# Altium PCB carrier_board.PcbDoc (part 9 of 18)
Units mm, origin at the board's own origin, x right, y up, seen from the top; angles counter-clockwise.
Board outline 146 x 102 mm, 20 copper layers (F.Cu, F.Mask, B.Cu, B.Mask, In1.Cu, F.SilkS, In2.Cu, B.SilkS, F.Adhes, B.Adhes, F.Paste, B.Paste, Dwgs.User, Cmts.User, Eco1.User, Eco2.User, Edge.Cuts, Margin, B.CrtYd, F.CrtYd); 256 components, 384 nets, 1262 pads, 1024 vias.
Unrouted connection lines stored in the file: 117.
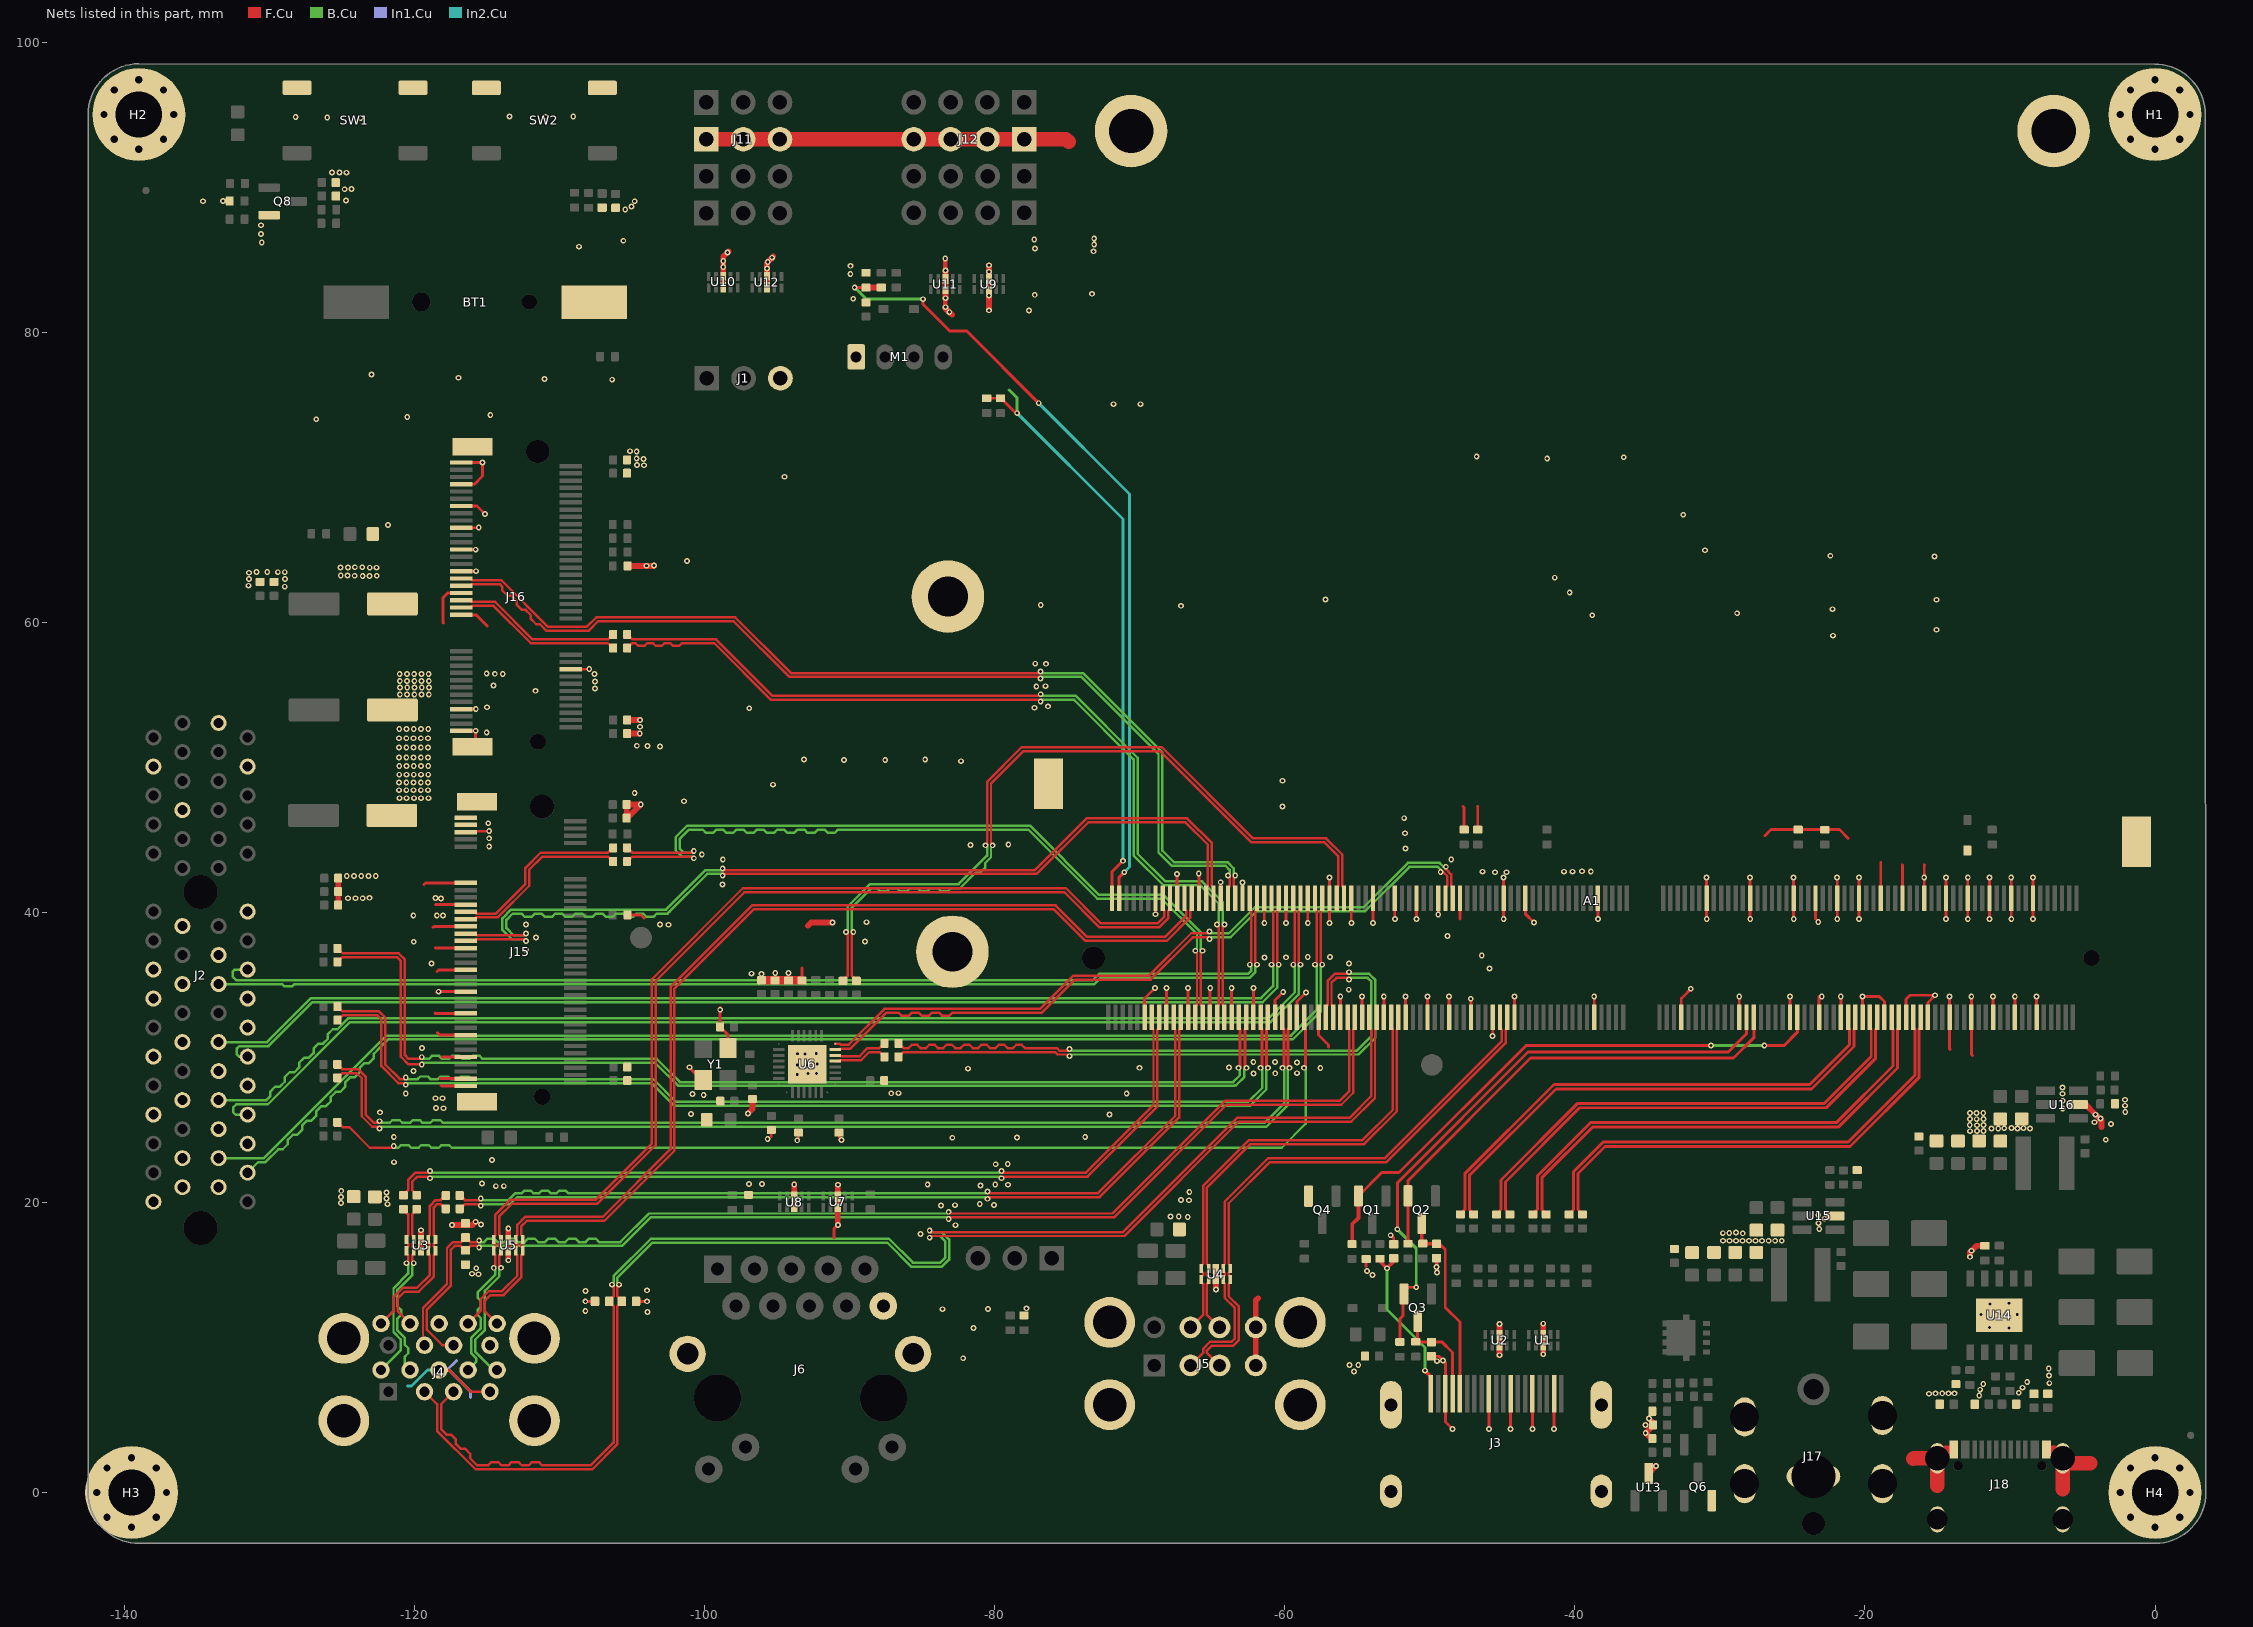
[diagram p19: the nets of this part, all layers, seen from the top]

## Via types
v1: diameter 0.4, hole 0.2, F.Cu to B.Cu, tented both sides, 956 vias
v2: diameter 0.5, hole 0.3, F.Cu to B.Cu, tented both sides, 68 vias

## Nets (pads, with @x,y where several pads share a name; then routed paths per layer and width w, separated by ;. In a path a pad name is that pad's centre, name@x,y a point inside that pad or via, vN(x,y) a via of type N, cw(c..) or ccw(c..) an arc to the next point about the centre after c; other vN are vias at no path point) (continued)
CON_PCIE_TX_0+: C55.2 J16.35 | length 11.7
  F.Cu w0.17: J16.35@-116.77,61.01 -116.145,61.01 -116.031,61.124 -114.546,61.124 -111.971,58.549 -106.659,58.549 -106.33,58.22 C55.2@-106.3,58.22
CON_PCIE_TX_0-: C56.2 J16.37 | length 11.7
  F.Cu w0.17: J16.37@-116.77,61.51 -116.145,61.51 -116.031,61.396 -114.434,61.396 -111.859,58.821 -106.659,58.821 -106.33,59.15 C56.2@-106.3,59.15
CON_PCIE_TX_1+: C49.2 J15.49 | length 12.7
  F.Cu w0.17: J15.49@-116.47,40.03 -115.845,40.03 -115.731,39.916 -114.386,39.916 -112.356,41.946 -112.356,43.056 -111.296,44.116 -106.664,44.116 -106.33,44.45 C49.2@-106.3,44.45
CON_PCIE_TX_1-: C50.2 J15.47 | length 12.7
  F.Cu w0.17: J15.47@-116.47,39.53 -115.845,39.53 -115.731,39.644 -114.274,39.644 -112.084,41.834 -112.084,42.944 -111.184,43.844 -106.664,43.844 -106.33,43.51 C50.2@-106.3,43.51
CON_USB1_D_N: A1.109 J5.2 U4.2 U4.9 | length 39.3
  F.Cu w0.17: J5.2@-66.5,8.762 -65.636,9.626 -65.636,9.906 -65.136,10.406 -63.656,10.406 -63.436,10.626 -63.436,12.714 -64.136,13.414 -64.136,14.379 -64.25,14.493 U4.9@-64.25,14.68 -64.25,14.867 -64.136,14.981 -64.136,15.154 -64.25,15.268 U4.2@-64.25,15.455 -64.25,15.642 -64.136,15.756 -64.136,20.056 -61.14,23.052 -53.1,23.052 -45.051,31.101 -45.051,31.921 -45.165,32.035 A1.109@-45.165,32.76
CON_USB1_D_P: A1.111 J5.3 U4.1 U4.10 | length 39.3
  F.Cu w0.17: J5.3@-64.5,8.762 -65.364,9.626 -65.364,9.794 -65.024,10.134 -63.544,10.134 -63.164,10.514 -63.164,12.826 -63.864,13.526 -63.864,14.379 -63.75,14.493 U4.10@-63.75,14.68 -63.75,14.867 -63.864,14.981 -63.864,15.154 -63.75,15.268 U4.1@-63.75,15.455 -63.75,15.642 -63.864,15.756 -63.864,19.944 -61.028,22.78 -52.988,22.78 -44.779,30.989 -44.779,31.921 -44.665,32.035 A1.111@-44.665,32.76
CON_USB2_D_N: A1.79 J5.6 U4.5 U4.6 | length 32
  F.Cu w0.17: J5.6@-66.5,11.382 -65.636,12.246 -65.636,13.43 -65.636,14.379 -65.75,14.493 U4.6@-65.75,14.68 -65.75,14.867 -65.636,14.981 -65.636,15.154 -65.75,15.268 U4.5@-65.75,15.455 -65.75,15.642 -65.636,15.756 -65.636,21.136 -62.476,24.296 -54.646,24.296 -52.551,26.391 -52.551,31.921 -52.665,32.035 A1.79@-52.665,32.76
CON_USB2_D_P: A1.81 J5.7 U4.4 U4.7 | length 32
  F.Cu w0.17: J5.7@-64.5,11.382 -65.364,12.246 -65.364,13.43 -65.364,14.379 -65.25,14.493 U4.7@-65.25,14.68 -65.25,14.867 -65.364,14.981 -65.364,15.154 -65.25,15.268 U4.4@-65.25,15.455 -65.25,15.642 -65.364,15.756 -65.364,21.024 -62.364,24.024 -54.534,24.024 -52.279,26.279 -52.279,31.921 -52.165,32.035 A1.81@-52.165,32.76
CON_USB3_D_N: A1.73 D8.2 J4.2 | length 96.7
  F.Cu w0.17: J4.2@-119.3,6.95 -118.436,6.086 -118.436,4.254 -115.786,1.604 -107.734,1.604 -106.004,3.334 -106.004,12.846 -105.695,13.155 D8.2@-105.695,13.18 -105.695,13.205 -106.004,13.514 -106.004,14.215 v1(-105.889,14.33) ; v1(-84.48,18.071) -84.365,17.956 -71.166,17.956 -63.29,25.832 -55.54,25.832 -54.051,27.321 -54.051,31.921 -54.165,32.035 A1.73@-54.165,32.76
  B.Cu w0.17: v1(-105.889,14.33) -106.004,14.445 -106.004,14.814 -103.594,17.224 -87.406,17.224 -85.756,15.574 -83.634,15.574 -83.144,16.064 -83.144,17.446 -83.654,17.956 -84.365,17.956 v1(-84.48,18.071)
CON_USB3_D_P: A1.75 D7.2 J4.3 | length 96.7
  F.Cu w0.17: J4.3@-117.3,6.95 -118.164,6.086 -118.164,4.366 -117.79,3.993 -117.483,3.993 -117.142,3.652 -117.142,3.344 -116.8,3.003 -116.493,3.003 -116.152,2.662 -116.152,2.354 -115.674,1.876 -114.924,1.876 -114.706,2.094 -114.224,2.094 -114.006,1.876 -113.524,1.876 -113.306,2.094 -112.824,2.094 -112.606,1.876 -112.124,1.876 -111.906,2.094 -111.424,2.094 -111.206,1.876 -107.846,1.876 -107.749,1.973 -106.276,3.446 -106.276,12.846 -106.585,13.155 D7.2@-106.585,13.18 -106.585,13.205 -106.276,13.514 -106.276,14.215 v1(-106.391,14.33) ; v1(-84.48,17.569) -84.365,17.684 -71.054,17.684 -63.178,25.56 -55.428,25.56 -53.779,27.209 -53.779,31.921 -53.665,32.035 A1.75@-53.665,32.76
  B.Cu w0.17: v1(-106.391,14.33) -106.276,14.445 -106.276,14.926 -103.706,17.496 -87.294,17.496 -85.644,15.846 -83.746,15.846 -83.416,16.176 -83.416,17.334 -83.766,17.684 -84.365,17.684 v1(-84.48,17.569)
CON_USB3_SSRX_N: A1.18 J4.5 U5.4 U5.7 | length 77
  F.Cu w0.17: v1(-114.029,15.49) -114.144,15.605 -114.144,16.368 -114.03,16.482 U5.7@-114.03,16.67 -114.03,16.857 -114.144,16.972 -114.144,17.143 -114.03,17.257 U5.4@-114.03,17.445 -114.03,17.632 -114.144,17.746 -114.144,19.054 -113.294,19.904 -107.414,19.904 -103.364,23.954 -103.364,35.274 -97.254,41.384 -75.196,41.384 -72.776,38.964 -68.674,38.964 -68.029,39.609 -68.029,40.121 -67.915,40.235 A1.18@-67.915,40.96
  B.Cu w0.17: J4.5@-114.3,8.45 -114.554,8.45 -115.824,9.72 -115.824,10.534 -115.144,11.214 -115.144,13.907 -114.144,14.907 -114.144,15.375 v1(-114.029,15.49)
CON_USB3_SSRX_P: A1.16 J4.6 U5.5 U5.6 | length 77
  F.Cu w0.17: v1(-114.531,15.49) -114.416,15.605 -114.416,16.368 -114.53,16.482 U5.6@-114.53,16.67 -114.53,16.857 -114.416,16.972 -114.416,17.143 -114.53,17.257 U5.5@-114.53,17.445 -114.53,17.632 -114.416,17.746 -114.416,19.166 -113.406,20.176 -107.526,20.176 -103.636,24.066 -103.636,35.386 -97.366,41.656 -75.084,41.656 -72.664,39.236 -68.786,39.236 -68.301,39.721 -68.301,40.121 -68.415,40.235 A1.16@-68.415,40.96
  B.Cu w0.17: J4.6@-116.3,8.45 -115.728,9.022 -115.728,9.239 -116.096,9.607 -116.096,10.646 -115.473,11.269 -115.416,11.326 -115.416,12.012 -115.624,12.22 -115.624,12.612 -115.416,12.82 -115.416,13.212 -115.624,13.42 -115.624,13.812 -114.792,14.644 -114.416,15.02 -114.416,15.375 v1(-114.531,15.49)
CON_USB3_SSTX_N: C26.2 J4.8 U3.4 U3.7 | length 12.7
  F.Cu w0.17: v1(-120.049,15.81) -120.164,15.925 -120.164,16.368 -120.05,16.482 U3.7@-120.05,16.67 -120.05,16.857 -120.164,16.972 -120.164,17.143 -120.05,17.257 U3.4@-120.05,17.445 -120.05,17.632 -120.164,17.746 -120.164,18.082 -120.166,18.084 -120.166,19.178 -119.842,19.502 C26.2@-119.842,19.532
  B.Cu w0.17: J4.8@-120.3,8.45 -120.68,8.83 -120.68,9.353 -120.43,9.603 -120.43,9.953 -120.68,10.203 -120.68,10.682 -120.744,10.747 -121.174,11.176 -121.174,11.993 -120.924,12.243 -120.924,12.593 -121.174,12.843 -121.174,13.501 -121.174,13.964 -120.164,14.974 -120.164,15.695 v1(-120.049,15.81)
CON_USB3_SSTX_P: C27.2 J4.9 U3.5 U3.6 | length 12.7
  F.Cu w0.17: C27.2@-120.762,19.532 -120.762,19.502 -120.438,19.178 -120.438,17.98 -120.436,17.978 -120.436,17.746 -120.55,17.632 U3.5@-120.55,17.445 -120.55,17.257 -120.436,17.143 -120.436,16.972 -120.55,16.857 U3.6@-120.55,16.67 -120.55,16.482 -120.436,16.368 -120.436,15.925 v1(-120.551,15.81)
  B.Cu w0.17: J4.9@-122.3,8.45 -120.952,9.798 -120.952,10.57 -121.446,11.064 -121.446,14.076 -120.436,15.086 -120.436,15.695 v1(-120.551,15.81)
CON_USB4_D_N: A1.67 D6.2 J4.11 | length 80.9
  F.Cu w0.17: J4.11@-119.3,10.15 -119.412,10.262 -119.412,12.73 -117.756,14.386 -117.756,16.846 -117.333,17.27 -116.79,17.27 D6.2@-116.48,17.58 -116.455,17.58 -116.145,17.27 -115.655,17.27 v1(-115.54,17.385) ; v1(-83.17,19.351) -83.055,19.236 -71.886,19.236 -64.12,27.002 -56.22,27.002 -55.551,27.671 -55.551,31.921 -55.665,32.035 A1.67@-55.665,32.76
  B.Cu w0.17: v1(-115.54,17.385) -115.425,17.27 -115.204,17.27 -114.966,17.507 -114.504,17.507 -114.266,17.27 -113.804,17.27 -113.566,17.507 -113.104,17.507 -112.866,17.27 -112.404,17.27 -112.166,17.507 -111.704,17.507 -111.466,17.27 -111.004,17.27 -110.766,17.507 -110.304,17.507 -110.066,17.27 -109.604,17.27 -109.366,17.507 -108.904,17.507 -108.666,17.27 -108.204,17.27 -107.966,17.507 -107.504,17.507 -107.266,17.27 -105.803,17.27 -105.748,17.325 -103.836,19.236 -83.285,19.236 v1(-83.17,19.351)
CON_USB4_D_P: A1.69 D5.2 J4.12 | length 80.9
  F.Cu w0.17: J4.12@-117.3,10.15 -118.07,10.15 -119.14,11.22 -119.14,12.618 -117.484,14.274 -117.484,16.734 -117.22,16.998 -116.815,16.998 -116.505,16.688 D5.2@-116.48,16.688 -116.455,16.688 -116.145,16.998 -115.655,16.998 v1(-115.54,16.883) ; v1(-83.17,18.849) -83.055,18.964 -71.774,18.964 -64.008,26.73 -56.108,26.73 -55.279,27.559 -55.279,31.921 -55.165,32.035 A1.69@-55.165,32.76
  B.Cu w0.17: v1(-115.54,16.883) -115.425,16.998 -105.69,16.998 -103.724,18.964 -83.285,18.964 v1(-83.17,18.849)
CON_USB4_SSRX_N: A1.24 J4.14 U5.1 U5.10 | length 73.5
  F.Cu w0.17: J4.14@-114.3,11.65 -115.164,12.514 -115.164,13.214 -114.764,13.614 -113.854,13.614 -112.644,14.824 -112.644,16.368 -112.53,16.482 U5.10@-112.53,16.67 -112.53,16.857 -112.644,16.972 -112.644,17.143 -112.53,17.257 U5.1@-112.53,17.445 -112.53,17.632 -112.644,17.746 -112.644,18.344 -112.254,18.734 -106.904,18.734 -102.074,23.564 -102.074,34.744 -96.614,40.204 -75.916,40.204 -73.746,38.034 -68.134,38.034 -66.529,39.639 -66.529,40.121 -66.415,40.235 A1.24@-66.415,40.96
CON_USB4_SSRX_P: A1.22 J4.15 U5.2 U5.9 | length 73.5
  F.Cu w0.17: J4.15@-116.3,11.65 -115.436,12.514 -115.436,13.326 -114.876,13.886 -113.966,13.886 -112.916,14.936 -112.916,16.368 -113.03,16.482 U5.9@-113.03,16.67 -113.03,16.857 -112.916,16.972 -112.916,17.143 -113.03,17.257 U5.2@-113.03,17.445 -113.03,17.632 -112.916,17.746 -112.916,18.456 -112.366,19.006 -107.016,19.006 -102.346,23.676 -102.346,34.856 -96.726,40.476 -75.804,40.476 -73.634,38.306 -68.246,38.306 -66.801,39.751 -66.801,40.121 -66.915,40.235 A1.22@-66.915,40.96
CON_USB4_SSTX_N: C28.2 J4.17 U3.1 U3.10 | length 11.2
  F.Cu w0.17: J4.17@-120.3,11.65 -121.164,12.514 -121.164,13.364 -120.684,13.844 -119.714,13.844 -118.664,14.894 -118.664,16.368 -118.55,16.482 U3.10@-118.55,16.67 -118.55,16.857 -118.664,16.972 -118.664,17.143 -118.55,17.257 U3.1@-118.55,17.445 -118.55,17.632 -118.664,17.746 -118.664,19.654 -118.434,19.884 -118.194,19.884 -117.87,19.56 C28.2@-117.84,19.56
CON_USB4_SSTX_P: C29.2 J4.18 U3.2 U3.9 | length 11.7
  F.Cu w0.17: J4.18@-122.3,11.65 -121.436,12.514 -121.436,13.476 -120.796,14.116 -119.826,14.116 -118.936,15.006 -118.936,16.368 -119.05,16.482 U3.9@-119.05,16.67 -119.05,16.857 -118.936,16.972 -118.936,17.143 -119.05,17.257 U3.2@-119.05,17.445 -119.05,17.632 -118.936,17.746 -118.936,19.766 -118.546,20.156 -118.194,20.156 -117.87,20.48 C29.2@-117.84,20.48
DDC_SCL: D1.2 J3.15 Q2.3 R15.2 | length 13.4
  F.Cu w0.2: D1.2@-49.31,17.13 -48.935,16.755 -48.935,12.765 -47.93,11.76 J3.15@-47.93,6.805
  F.Cu w0.25: Q2.3@-50.56,18.573 -50.56,17.43 -50.28,17.15 -49.33,17.15 D1.2@-49.31,17.13
DDC_SDA: D3.2 J3.16 Q3.3 R18.2 | length 7.3
  F.Cu w0.206: Q3.3@-50.835,11.953 -50.835,10.52 R18.2@-50.965,10.39 -49.175,10.39 -48.43,9.645 J3.16@-48.43,6.805
DDI_B_DDC_SCL: A1.171 Q2.2 R5.2 | length 33.7
  F.Cu w0.209: R5.2@-51.5,17.15 -51.5,20.438 Q2.2@-51.51,20.447 -51.51,21.497 -43.056,29.951 -29.059,29.951 -27.665,31.345 A1.171@-27.665,32.76
DDI_B_DDC_SDA: A1.169 Q3.2 R3.2 | length 41.7
  F.Cu w0.2: v1(-52.24,18.15) -52.24,21.345 -43.225,30.36 -29.43,30.36 -28.165,31.625 A1.169@-28.165,32.76 ; Q3.2@-51.785,13.828 -51.463,14.15 v1(-50.935,14.15)
  F.Cu w0.206: R3.2@-52.065,10.382 -52.065,11.97 -51.835,12.2 -51.835,13.637 Q3.2@-51.785,13.687
  B.Cu w0.2: v1(-52.24,18.15) -50.935,16.845 -50.935,14.1 v1(-50.935,14.15)
DDI_B_HPD: A1.183 Q1.2 R4.2 | length 39.5
  F.Cu w0.209: Q1.2@-54.92,20.445 -53.308,22.057 -52.123,22.057 -43.37,30.81 v1(-30.62,30.81) ; v1(-26.94,30.81) -25.581,30.81 -24.665,31.726 A1.183@-24.665,32.76
  F.Cu w0.25: R4.2@-55.36,17.127 -55.36,18.49 -54.92,18.93 Q1.2@-54.92,20.445
  B.Cu w0.209: v1(-30.62,30.81) v1(-26.94,30.81)
DDI_B_TX0+: A1.217 C17.1 | length 33.4
  F.Cu w0.206: C17.1@-39.475,19.17 -39.475,19.2 -39.781,19.506 -39.781,21.991 -37.923,23.85 -21.035,23.85 -16.261,28.624 -16.261,31.939 -16.165,32.035 A1.217@-16.165,32.76
DDI_B_TX0-: A1.215 C18.1 | length 33.4
  F.Cu w0.206: C18.1@-40.395,19.17 -40.395,19.2 -40.089,19.506 -40.089,22.119 -38.314,23.894 -38.05,24.157 -21.162,24.157 -16.569,28.751 -16.569,31.939 -16.665,32.035 A1.215@-16.665,32.76
DDI_B_TX1+: A1.211 C19.1 | length 33.8
  F.Cu w0.206: C19.1@-41.975,19.17 -41.975,19.2 -42.281,19.506 -42.281,21.694 -38.789,25.186 -21.849,25.186 -17.761,29.274 -17.761,31.939 -17.665,32.035 A1.211@-17.665,32.76
DDI_B_TX1-: A1.209 C20.1 | length 33.8
  F.Cu w0.206: C20.1@-42.895,19.17 -42.895,19.2 -42.589,19.506 -42.589,21.821 -38.916,25.494 -21.976,25.494 -18.069,29.401 -18.069,31.939 -18.165,32.035 A1.209@-18.165,32.76
DDI_B_TX2+: A1.205 C21.1 | length 34.3
  F.Cu w0.206: C21.1@-44.482,19.17 -44.482,19.2 -44.788,19.506 -44.788,21.412 -39.674,26.526 -22.666,26.526 -19.261,29.931 -19.261,31.939 -19.165,32.035 A1.205@-19.165,32.76
DDI_B_TX2-: A1.203 C22.1 | length 34.3
  F.Cu w0.206: C22.1@-45.402,19.17 -45.402,19.2 -45.096,19.506 -45.096,21.539 -39.801,26.834 -22.794,26.834 -19.569,30.059 -19.569,31.939 -19.665,32.035 A1.203@-19.665,32.76
DDI_B_TX3+: A1.199 C23.1 | length 35.1
  F.Cu w0.206: C23.1@-46.974,19.17 -46.974,19.2 -47.28,19.506 -47.28,21.852 -41.306,27.826 -23.686,27.826 -20.761,30.751 -20.761,31.939 -20.665,32.035 A1.199@-20.665,32.76
DDI_B_TX3-: A1.197 C24.1 | length 35.1
  F.Cu w0.206: C24.1@-47.894,19.17 -47.894,19.2 -47.588,19.506 -47.588,21.98 -41.434,28.134 -23.814,28.134 -21.069,30.879 -21.069,31.939 -21.165,32.035 A1.197@-21.165,32.76
FAN_1_PWM: A1.2 R64.2 R69.1 TP12.1 | length 41.1
  F.Cu w0.2: R69.1@-80.55,75.44 R64.2@-79.6,75.44 -79.56,75.44 -78.53,74.41 v1(-78.45,74.41) ; A1.2@-71.915,40.96 -71.915,42.795 v1(-71.16,43.55)
  B.Cu w0.2: TP12.1@-79,76 -78.45,75.45 v1(-78.45,74.41)
  In2.Cu w0.2: v1(-78.45,74.41) -71.16,67.12 v1(-71.16,43.55)
FAN_1_TAC: A1.4 R66.1 R68.2 TP11.1 | length 55.1
  F.Cu w0.2: v1(-89.65,83.08) -89.64,83.07 R66.1@-88.87,83.07 ; v1(-84.95,82.27) -84.95,81.92 -83.12,80.09 -81.95,80.09 v1(-76.96,75.1) ; A1.4@-71.415,40.96 -71.415,42.415 v1(-71.07,42.76)
  F.Cu w0.4: R66.1@-88.87,83.07 R68.2@-87.82,83.07
  B.Cu w0.2: v1(-89.65,83.08) -88.84,82.27 v1(-84.95,82.27)
  In2.Cu w0.2: v1(-76.96,75.1) -70.7,68.84 -70.7,43.13 v1(-71.07,42.76)
GbE_PCIe_CLK+: A1.94 U6.15 | length 49.9
  F.Cu w0.17: U6.15@-90.985,30.54 -90.685,30.54 -90.621,30.604 -89.944,30.604 -87.484,33.064 -86.616,33.064 -86.435,32.883 -85.916,32.883 -85.735,33.064 -85.216,33.064 -85.035,32.883 -84.516,32.883 -84.335,33.064 -83.816,33.064 -83.635,32.883 -83.116,32.883 -82.935,33.064 -80.93,33.064 -76.764,33.064 -74.464,35.364 -69.254,35.364 -66.334,38.284 -65.295,38.284 v1(-65.18,38.169) ; v1(-49.252,42.788) -49.09,42.788 -48.801,42.499 -48.801,41.799 -48.915,41.685 A1.94@-48.915,40.96
  B.Cu w0.17: v1(-65.18,38.169) -65.065,38.284 -63.734,38.284 -61.944,40.074 -54.464,40.074 -51.404,43.134 -49.436,43.134 -49.252,42.95 v1(-49.252,42.788)
GbE_PCIe_CLK-: A1.96 U6.16 | length 49.9
  F.Cu w0.17: U6.16@-90.985,30.94 -90.685,30.94 -90.621,30.876 -90.057,30.876 -87.596,33.336 -76.876,33.336 -74.576,35.636 -69.366,35.636 -66.446,38.556 -65.295,38.556 v1(-65.18,38.671) ; v1(-48.898,43.142) -48.898,42.98 -48.529,42.611 -48.529,41.799 -48.415,41.685 A1.96@-48.415,40.96
  B.Cu w0.17: v1(-65.18,38.671) -65.065,38.556 -63.846,38.556 -62.056,40.346 -54.576,40.346 -51.516,43.406 -49.324,43.406 -49.06,43.142 v1(-48.898,43.142)
GbE_PCIe_RX+: A1.64 C43.2 | length 53.2
  F.Cu w0.17: v1(-89.744,38.64) -89.859,38.525 -89.859,35.634 -89.535,35.31 C43.2@-89.535,35.28 ; v1(-80.139,44.62) -80.254,44.735 -80.254,48.884 -78.024,51.114 -68.596,51.114 -62.306,44.824 -57.266,44.824 -56.301,43.859 -56.301,41.799 -56.415,41.685 A1.64@-56.415,40.96
  B.Cu w0.17: v1(-89.744,38.64) -89.859,38.755 -89.859,40.299 -88.484,41.674 -88.133,41.674 -87.916,41.456 -87.433,41.456 -87.216,41.674 -86.733,41.674 -86.516,41.456 -86.033,41.456 -85.816,41.674 -85.333,41.674 -85.116,41.456 -84.633,41.456 -84.416,41.674 -83.933,41.674 -83.716,41.456 -83.233,41.456 -83.016,41.674 -82.374,41.674 -81.313,42.735 -81.005,42.735 -80.664,43.076 -80.664,43.384 -80.254,43.794 -80.254,44.505 v1(-80.139,44.62)
GbE_PCIe_RX-: A1.66 C39.2 | length 53.2
  F.Cu w0.17: C39.2@-90.455,35.28 -90.455,35.31 -90.131,35.634 -90.131,38.525 v1(-90.246,38.64) ; v1(-80.641,44.62) -80.526,44.735 -80.526,48.996 -78.136,51.386 -68.484,51.386 -62.194,45.096 -57.154,45.096 -56.029,43.971 -56.029,41.799 -55.915,41.685 A1.66@-55.915,40.96
  B.Cu w0.17: v1(-90.246,38.64) -90.131,38.755 -90.131,40.411 -88.596,41.946 -82.486,41.946 -80.526,43.906 -80.526,44.505 v1(-80.641,44.62)
GbE_PCIe_TX+: A1.61 C42.2 | length 44
  F.Cu w0.17: C42.2@-86.63,30.037 -86.6,30.037 -86.275,30.363 -75.827,30.363 -75.662,30.198 -74.962,30.198 v1(-74.847,30.083) ; A1.61@-57.165,32.76 -57.165,33.485 -57.051,33.599 -57.051,35.265 -56.559,35.757 -55.696,35.757 v1(-55.581,35.872)
  B.Cu w0.17: v1(-74.847,30.083) -74.732,30.198 -54.913,30.198 -53.757,31.354 -53.757,35.337 -54.177,35.757 -55.466,35.757 v1(-55.581,35.872)
GbE_PCIe_TX-: A1.63 C38.2 | length 44
  F.Cu w0.17: C38.2@-86.63,30.96 -86.6,30.96 -86.275,30.635 -85.943,30.635 -85.71,30.868 -85.343,30.868 -85.11,30.635 -84.743,30.635 -84.51,30.868 -84.143,30.868 -83.91,30.635 -83.543,30.635 -83.31,30.868 -82.943,30.868 -82.71,30.635 -82.343,30.635 -82.11,30.868 -81.743,30.868 -81.51,30.635 -81.143,30.635 -80.91,30.868 -80.543,30.868 -80.31,30.635 -79.943,30.635 -79.71,30.868 -79.343,30.868 -79.11,30.635 -78.743,30.635 -78.51,30.868 -78.143,30.868 -77.91,30.635 -75.782,30.635 -75.714,30.635 -75.55,30.47 -74.962,30.47 v1(-74.847,30.585) ; A1.63@-56.665,32.76 -56.665,33.485 -56.779,33.599 -56.779,35.153 -56.447,35.485 -55.696,35.485 v1(-55.581,35.37)
  B.Cu w0.17: v1(-74.847,30.585) -74.732,30.47 -55.025,30.47 -54.029,31.466 -54.029,35.225 -54.289,35.485 -55.466,35.485 v1(-55.581,35.37)
GND: A1.11 A1.14 A1.17 A1.20 A1.23 A1.26 A1.29 A1.32 A1.35 A1.38 A1.41 A1.44 A1.47 A1.50 A1.53 A1.56 A1.59 A1.62 A1.65 A1.68 A1.71 A1.74 A1.77 A1.80 A1.83 A1.86 A1.89 A1.92 A1.95 A1.98 A1.101 A1.107 A1.110 A1.113 A1.116 A1.135 A1.136 A1.151 A1.158 A1.167 A1.170 A1.181 A1.182 A1.188 A1.189 A1.194 A1.195 A1.200 A1.201 A1.206 A1.207 A1.212 A1.213 A1.218 A1.219 A1.224 A1.225 A1.230 A1.231 A1.236 A1.237 A1.242 A1.243 A1.248 A1.249 A1.MP BT1.2 C9.2 C10.2 C11.2 C12.2 C13.1 C14.1 C15.2 C16.2 C25.2 C30.1 C31.1 C32.1 C33.1 C34.1 C35.1 C36.1 C37.1 C40.1 C41.1 C44.1 C45.1 C46.1 C47.1 C48.2 C51.1 C52.1 C53.1 C54.1 C57.1 C58.1 C59.1 C60.1 C61.2 C62.2 C64.1 C65.1 C66.2 C67.1 C68.1 C69.2 C74.1 C75.1 C76.1 C77.1 C78.2 C79.2 C80.1 C81.1 C82.1 C83.1 C84.2 D1.1 D2.1 D3.1 D5.1 D6.1 D7.1 D8.1 D10.1 D11.1 D12.2 D13.2 D14.2 D21.1 D23.1 D24.2 D25.1 H1.1 H2.1 H3.1 H4.1 H5.1 H6.1 H7.1 H8.1 J1.3 J2.A1 J2.A4 J2.A12 J2.A15 J2.A18 J2.A20 J2.A23 J2.A24 J2.A27 J2.A28 J2.A31 J2.B4 J2.B7 J2.B13 J2.B16 J2.B17 J2.B18 J2.B21 J2.B22 J2.B25 J2.B26 J2.B29 J2.B31 J2.B32 J3.2 J3.5 J3.8 J3.11 J3.17 J3.SH J4.4 J4.7 J4.13 J4.16 J4.19 J5.4 J5.8 J5.9 J6.R10 J6.SH J11.1 J11.2 J11.3 J12.1 J12.2 J12.3 J12.4 J15.1 J15.3 J15.9 J15.15 J15.21 J15.27 J15.33 J15.39 J15.45 J15.51 J15.57 J15.71 J15.73 J15.75 J15.MP1 J15.MP2 J16.1 J16.7 J16.18 J16.33 J16.39 J16.45 J16.51 J16.57 J16.63 J16.69 J16.75 J16.MP1 J16.MP2 J17.2 J17.3 J18.A1 J18.A12 J18.B1 J18.B12 J18.S1 M1.1 Q4.2 Q6.2 Q8.2 R6.2 R22.1 R27.2 R32.2 R39.1 R42.1 R43.2 R49.1 R51.1 R58.1 R60.1 R66.2 R76.2 R77.2 R78.2 R79.2 SW1.2 SW2.2 U1.3 U1.8 U2.3 U2.8 U3.3 U3.8 U4.3 U4.8 U5.3 U5.8 U6.33 U7.3 U7.8 U8.3 U8.8 U9.3 U9.8 U10.3 U10.8 U11.3 U11.8 U12.3 U12.8 U13.3 U14.0 U15.2 U16.2 Y1.2 Y1.4 | length 316.8
  F.Cu w0.15: -95.4,24.51 C41.1@-95.4,25 ; v1@-93.52,24.31 -93.58,24.31 v1(-93.61,24.28) -93.52,24.37 C35.1@-93.52,24.81 ; -93.52,24.51 -93.51,24.5 ; v1@-90.735,24.315 -90.555,24.315 v1(-90.55,24.31) -90.735,24.495 C36.1@-90.735,24.81 ; C36.1@-90.735,24.535 -90.72,24.52
  F.Cu w0.2: -119.34,41.93 -119.24,42.03 J15.57@-116.47,42.03 ; -118.71,38.97 -118.65,39.03 J15.45@-116.47,39.03 ; -118.59,33.05 -118.57,33.03 J15.21@-116.47,33.03 ; -118.56,37.56 -118.53,37.53 J15.39@-116.47,37.53 ; -118.55,40.55 -118.53,40.53 J15.51@-116.47,40.53 ; v1@-118.49,34.49 -118.45,34.53 v1(-118.33,34.53) J15.27@-116.47,34.53 ; -118.44,35.93 -118.34,36.03 J15.33@-116.47,36.03 ; -118.41,31.7 -118.24,31.53 J15.15@-116.47,31.53 ; -118.21,28.56 -118.18,28.53 J15.3@-116.47,28.53 ; -118.16,28.07 -118.12,28.03 J15.1@-116.47,28.03 ; -118.1,30.02 -118.09,30.03 J15.9@-116.47,30.03 ; J4.7@-118.07,8.68 J4.7@-118.3,8.45 -117.598,8.45 -116.098,6.95 J4.4@-114.8,6.95 ; -118.01,59.94 -118.03,59.96 -118.03,61.69 -117.71,62.01 J16.39@-116.77,62.01 -117.695,62.01 ; J16.1@-116.77,52.51 -115.79,52.51 v1(-115.78,52.52) -115.78,51.625 J16.MP1@-115.995,51.41 ; J16.7@-116.77,54.01 -115.78,54.01 v1(-115.77,54.02) ; J16.33@-116.77,60.51 -115.75,60.51 -114.98,59.74 ; J16.45@-116.77,63.51 -115.77,63.51 v1(-115.76,63.52) ; J16.51@-116.77,65.01 -115.79,65.01 v1(-115.78,65) ; J16.57@-116.77,66.51 -115.58,66.51 v1(-115.57,66.52) ; J16.63@-116.77,68.01 -115.69,68.01 -115.45,67.77 -115.15,67.47 v1(-115.14,67.47) ; J16.69@-116.77,69.51 -115.87,69.51 -115.3,70.08 v1(-115.3,71.01) J16.75@-116.77,71.01 ; J15.71@-116.47,45.53 v1(-114.85,45.6) -114.91,45.53 v1@-114.9,45.52 ; J16.18@-109.22,56.76 -107.96,56.76 v1(-107.95,56.77) ; v1(-108.22,13.18) D7.1@-107.555,13.18 ; R27.2@-105.32,39.82 -104.38,39.82 -104.16,39.6 ; D8.1@-104.725,13.18 v1(-103.97,13.18) ; v1(-101.04,29.32) -101.05,29.31 -101.05,29.3 -100.19,28.44 Y1.2@-100.085,28.44 ; v1@-98.92,33.43 -98.925,33.425 v1(-98.925,33.28) C47.1@-98.925,32.1 -98.385,31.56 Y1.4@-98.385,30.64 ; C40.1@-96.075,35.32 v1(-96.075,35.76) v1@-96.075,35.82 ; -93.28,36.17 -93.275,36.165 C33.1@-93.275,35.29 ; -91.08,17.56 -91.08,18.18 v1(-90.81,18.45) ; v1@-83.43,85.1 v1(-83.41,85.08) v1@-83.4,85.07 ; v1@-80.4,84.6 v1(-80.39,84.61) ; A1.11@-69.665,32.76 -69.665,34.065 v1(-68.94,34.79) ; A1.14@-68.915,40.96 -68.915,39.875 v1(-68.91,39.87) ; A1.17@-68.165,32.76 -68.165,34.765 v1(-68.15,34.78) ; A1.20@-67.42,41.22 v1@-67.42,42.645 ; v1(-66.67,34.78) -66.665,34.775 A1.23@-66.665,32.76 ; v1(-65.93,42.67) -65.915,42.655 A1.26@-65.915,40.96 ; A1.29@-65.165,32.76 -65.165,34.755 v1(-65.14,34.78) ; v1(-64.42,42.07) -64.415,42.065 A1.32@-64.415,40.96 ; A1.35@-63.665,32.76 -63.665,34.775 v1(-63.66,34.78) ; v1(-62.92,42.06) -62.915,42.055 A1.38@-62.915,40.96 ; A1.41@-62.165,32.76 -62.165,34.765 v1(-62.15,34.78) ; A1.44@-61.415,40.96 -61.415,39.275 v1(-61.41,39.27) ; A1.47@-60.665,32.76 -60.665,33.955 -60.51,34.11 -60.12,34.5 v1(-60.11,34.5) ; v1@-59.915,39.275 A1.50@-59.915,40.96 ; A1.53@-59.165,32.76 -59.165,33.845 v1(-58.53,34.48) ; v1@-58.415,39.275 A1.56@-58.415,40.96 ; A1.59@-57.665,32.76 -57.665,31.535 -56.99,30.86 -56.99,30.72 ; v1@-56.915,39.275 A1.62@-56.915,40.96 v1@-56.915,42.385 ; A1.65@-56.165,32.76 v1@-56.165,34.185 ; v1@-55.415,39.275 A1.68@-55.415,40.96 ; A1.71@-54.665,32.76 v1@-54.665,34.185 ; -54.41,15.58 -54.39,15.6 R6.2@-54.39,16.098 ; v1@-53.915,39.275 A1.74@-53.915,40.96 ; A1.77@-53.165,32.76 v1@-53.165,34.185 ; v1(-52.7,17.74) -52.49,17.53 D2.1@-52.49,17.123 ; v1@-52.415,39.535 A1.80@-52.415,40.96 ; A1.83@-51.665,32.76 v1@-51.665,34.185 ; v1@-50.915,39.535 A1.86@-50.915,40.96 ; A1.89@-50.165,32.76 v1@-50.165,34.185 ; D3.1@-49.885,9.395 -49.38,9.395 v1(-49.085,9.1) -48.93,8.945 J3.17@-48.93,6.805 -48.93,4.86 v1(-48.44,4.37) ; v1(-49.42,39.84) -49.415,39.845 A1.92@-49.415,40.96 ; A1.95@-48.665,32.76 v1@-48.665,34.185 ; -47.915,39.535 A1.98@-47.915,40.96 ; -47.7,47.3 -47.635,47.235 R79.2@-47.635,45.7 ; v1(-47.18,34.04) -47.165,34.025 A1.101@-47.165,32.76 ; -46.7,47.3 -46.695,47.295 R78.2@-46.695,45.7 ; v1(-45.93,4.37) J3.11@-45.93,6.805 ; v1(-45.67,31.48) -45.665,31.485 A1.107@-45.665,32.76 ; v1@-44.915,39.535 A1.110@-44.915,40.96 v1@-44.915,42.385 ; v1(-44.43,4.37) J3.8@-44.43,6.805 ; A1.113@-44.165,32.76 v1@-44.165,34.185 ; A1.116@-43.415,40.96 -43.415,39.895 v1(-42.82,39.3) ; v1(-42.93,4.37) J3.5@-42.93,6.805 ; v1(-41.43,4.37) J3.2@-41.43,6.805 ; A1.135@-38.665,32.76 v1@-38.665,34.185 ; v1@-38.415,39.535 A1.136@-38.415,40.96 ; A1.151@-32.665,32.76 -32.665,34.055 -32.52,34.2 -32.01,34.71 v1(-32.01,34.73) ; v1@-30.915,39.535 A1.158@-30.915,40.96 v1@-30.915,42.385 ; A1.167@-28.665,32.76 v1@-28.665,34.185 ; v1@-27.915,39.535 A1.170@-27.915,40.96 v1@-27.915,42.385 ; -26.903,45.279 -26.482,45.7 R77.2@-24.604,45.7 -21.766,45.7 -21.16,45.094 ; A1.181@-25.165,32.76 v1@-25.165,34.185 ; v1@-24.915,39.535 A1.182@-24.915,40.96 v1@-24.915,42.385 ; -23.415,39.535 A1.188@-23.415,40.96 ; A1.189@-23.165,32.76 v1@-23.165,34.185 ; v1@-21.915,39.535 A1.194@-21.915,40.96 v1@-21.915,42.385 ; A1.195@-21.665,32.76 v1@-21.665,34.185 ; v1@-20.415,39.535 A1.200@-20.415,40.96 v1@-20.415,42.385 ; v1(-20.17,34.19) -19.01,34.19 -18.665,33.845 A1.207@-18.665,32.76 ; A1.201@-20.165,32.76 v1@-20.165,34.185 ; A1.206@-18.915,40.96 -18.915,41.985 -18.91,41.99 -18.91,43.43 ; -17.43,43.27 -17.415,43.255 A1.212@-17.415,40.96 ; A1.213@-17.165,32.76 -17.165,34.005 -16.89,34.28 v1(-15.17,34.28) -15.665,33.785 A1.219@-15.665,32.76 ; v1@-15.915,42.385 A1.218@-15.915,40.96 -15.915,43.255 -15.91,43.26 ; v1@-14.415,39.535 A1.224@-14.415,40.96 v1@-14.415,42.385 ; v1(-14.17,34.19) -14.165,34.185 A1.225@-14.165,32.76 -14.165,30.58 -14.126,30.541 ; v1@-12.915,39.535 A1.230@-12.915,40.96 v1@-12.915,42.385 ; v1@-12.665,34.185 A1.231@-12.665,32.76 -12.665,30.198 -12.59,30.123 ; v1@-11.415,39.535 A1.236@-11.415,40.96 v1@-11.415,42.385 ; A1.237@-11.165,32.76 v1@-11.165,34.185 ; v1@-9.915,39.535 A1.242@-9.915,40.96 v1@-9.915,42.385 ; A1.243@-9.665,32.76 v1@-9.665,34.185 ; v1@-8.415,39.535 A1.248@-8.415,40.96 v1@-8.415,42.385 ; A1.249@-8.165,32.76 v1@-8.165,34.185
  F.Cu w0.25: D1.1@-49.535,16.183 v1(-49.535,15.55) -49.5,15.515 v1(-49.5,15.17)
  F.Cu w0.3: v1(-83.4,81.72) v1(-83.4,82.34) ; v1(-83.4,84.24) v1@-83.4,85.07
  F.Cu w0.4: C13.1@-125.26,40.503 C15.2@-125.26,42.35 ; U3.8@-119.55,16.645 U3.3@-119.55,17.407 v1(-119.55,18.08) ; v1(-117.42,18.45) -116,18.45 v1(-115.78,18.67) ; v1(-113.53,16.01) U5.8@-113.53,16.645 v1(-113.53,18.21) ; C57.1@-105.34,52.33 v1(-104.47,52.33) ; C58.1@-105.34,53.26 v1(-104.45,53.26) ; R32.2@-105.31,63.88 -103.51,63.88 v1(-103.48,63.91) ; U10.3@-98.71,83.093 v1(-98.71,84.49) v1(-98.71,84.9) -98.71,85.21 v1(-98.425,85.495) v1@-98.36,85.56 ; v1(-97.01,26.13) -96.695,26.445 C34.1@-96.695,27.12 ; U12.3@-95.7,83.09 v1(-95.7,84.38) -95.7,84.77 v1(-95.645,84.825) v1(-95.34,85.13) v1@-95.26,85.21 ; v1@-93.82,21.23 v1(-93.815,21.225) U8.8@-93.815,19.628 ; -92.87,39.07 -92.64,39.3 v1(-91.17,39.3) ; v1(-90.81,18.45) -90.815,18.455 U7.8@-90.815,19.633 -90.815,21.215 v1(-90.81,21.22) ; v1(-83.4,81.72) -83.4,81.65 v1(-83.125,81.375) -82.94,81.19 ; v1(-83.4,82.34) U11.8@-83.4,82.907 v1(-83.4,84.24) ; v1(-80.4,81.5) v1(-80.4,82.53) U9.8@-80.4,82.907 v1(-80.4,84.16) v1@-80.4,84.6 ; v1(-64.75,13.99) U4.8@-64.75,14.655 U4.3@-64.75,15.418 ; J5.4@-62,8.762 J5.8@-62,11.382 -62,13.25 -61.85,13.4 ; v1(-45.19,9.47) U2.8@-45.19,10.085 v1(-45.19,11.61) ; v1(-42.18,9.53) U1.8@-42.18,10.085 U1.3@-42.18,10.847 v1(-42.18,11.64) ; U13.3@-34.91,1.31 v1(-34.4,1.82) ; v1(-34.9,5.11) -34.61,4.82 C62.2@-34.61,4.663 -34.61,4.61 v1(-35.12,4.1) -34.743,3.722 R39.1@-34.66,3.722 ; v1(-12.76,16.25) -12.76,16.57 v1(-12.66,16.67) -12.32,17.01 R43.2@-11.74,17.01 ; U16.2@-5.273,26.805 -4.849,26.805 -4.11,26.066 v1(-4.11,26.05) -4.094,26.05 -3.834,25.79 v1(-3.77,25.79) -3.77,25.726 -3.7,25.656 -3.7,25.2 ; C51.1@-105.37,46.5 C52.1@-105.37,47.43 v1(-104.4,47.43) -105.33,46.5 C51.1@-105.37,46.5
  F.Cu w0.6: C40.1@-96.075,35.32 -93.305,35.32 C33.1@-93.275,35.29 ; J18.S1@-15.01,2.355 -14.41,2.955 J18.B12@-13.89,2.955 ; J18.B1@-7.49,2.955 -6.97,2.955 J18.S1@-6.37,2.355
  F.Cu w1: J11.1@-99.88,93.29 -85.59,93.29 J12.4@-85.58,93.3 ; -88.82,93.29 -88.81,93.3 J12.4@-85.58,93.3 ; -74.9,93.11 -75.09,93.3 J12.4@-85.58,93.3 ; -16.67,2.32 -16.635,2.355 J18.S1@-15.01,2.355 -15.01,0.45 ; -6.38,0.23 -6.37,0.24 J18.S1@-6.37,2.355 -6.045,2.03 -4.47,2.03
  In1.Cu w0.2: -117.09,9.11 -117.75,8.45 J4.7@-118.3,8.45 -117.598,8.45 -116.15,7.002 -116.15,6.55
  In2.Cu w0.2: -120.47,7.34 -120.208,7.34 -119.098,8.45 J4.7@-118.3,8.45
  other v1: -35.14,4.66 -12.12,6.68 -15.59,6.81 -15.14,6.84 -14.67,6.84 -14.25,6.84 -13.82,6.84 -9.4,6.88 -12.06,7.09 -9.14,7.23 -11.85,7.48 -7.29,7.54 -8.82,7.61 -7.31,8.06 -55.235,8.35 -7.33,8.56 -55.535,8.8 -54.935,8.8 -49.506,9.054 -82.17,9.26 -81.47,11.34 -10.07,11.35 -11.41,11.37 -12,12.26 -9.5,12.27 -10.72,12.31 -103.94,12.45 -108.22,12.51 -83.59,12.64 -80.47,12.65 -77.8,12.7 -11.38,13 -10.07,13.05 -108.2,13.89 -103.97,13.94 -53.96,15 -115.59,15.05 -116.03,15.08 -54.34,15.28 -115.74,15.46 -29.799,17.36 -29.348,17.36 -28.897,17.36 -28.446,17.36 -27.994,17.36 -27.543,17.36 -27.092,17.36 -26.641,17.36 -26.19,17.36 -25.739,17.36 -85.12,17.83 -28.43,17.87 -29.8,17.88 -29.36,17.9 -28.9,17.92 -23.15,18.16 -82.7,18.43 -115.41,18.48 -23.2,18.57 -22.79,18.88 -66.69,18.99 -67.88,19.03 -67.31,19.02 -23.22,19.13 -83.71,19.78 -82.73,19.81 -80.04,19.83 -121.86,19.88 -81.03,19.89 -125.06,19.97 -66.61,20.15 -67.16,20.17 -121.92,20.28 -125.06,20.37 -121.92,20.69 -66.58,20.72 -125.05,20.8 -114.39,21.12 -113.84,21.12 -80.98,21.16 -79.09,21.22 -84.62,21.23 -79.96,21.23 -96.93,21.26 -96.045,21.27 -115.35,21.31 -79.93,22.63 -79.1,22.65 -121.412,22.773 -114.65,22.92 -3.4,24.32 -95.65,24.37 -82.92,24.46 -78.47,24.47 -73.76,24.5 -121.423,24.51 -12.77,24.91 -12.27,24.92 -11.82,24.92 -11.27,25.09 -10.81,25.09 -10.4,25.11 -9.48,25.1 -8.63,25.1 -9.89,25.13 -9.07,25.12 -12.78,25.33 -12.28,25.32 -11.84,25.34 -3.05,25.41 -4.18,25.53 -12.3,25.74 -12.77,25.76 -11.84,25.75 -72.09,26.07 -100.94,26.09 -12.75,26.16 -12.31,26.17 -11.85,26.16 -122.38,26.21 -2.06,26.24 -6.37,26.48 -118,26.49 -118.52,26.51 -2.08,26.67 -6.37,27.01 -2.08,27.08 -118.55,27.18 -118.06,27.18 -100.06,27.4 -100.83,27.48 -6.39,27.49 -120.6,27.5 -87.13,27.52 -70.9,27.51 -86.64,27.53 -6.39,27.93 -93.61,28.83 -92.87,28.89 -92.29,28.89 -62.15,28.89 -60.66,28.9 -59.16,28.91 -120.06,29.07 -81.84,29.22 -57.55,29.27 -70.01,29.28 -63.85,29.3 -93.61,29.46 -92.88,29.49 -92.23,29.53 -59.16,29.65 -60.67,29.68 -62.17,29.69 -93.08,30.24 -93.6,30.25 -92.3,30.26 -119.48,30.64 -56.17,34.19 -54.67,34.19 -53.17,34.19 -51.67,34.19 -50.17,34.19 -48.67,34.19 -44.17,34.19 -38.67,34.19 -28.67,34.19 -25.17,34.19 -22.98,34.19 -21.67,34.19 -12.67,34.19 -11.17,34.19 -9.67,34.19 -8.17,34.19 -55.592,34.666 -96.77,35.77 -95.13,35.82 -94.22,35.82 -45.88,36.13 -118.819,36.473 -55.569,36.478 -61.408,36.875 -59.911,36.896 -58.414,36.917 -56.875,36.917 -46.42,37.02 -112.31,37.4 -120.05,37.97 -88.95,37.98 -111.63,38.27 -48.78,38.36 -112.31,39.15 -103.07,39.15 -102.49,39.14 -59.91,39.27 -58.41,39.27 -56.91,39.27 -55.41,39.27 -53.91,39.27 -88.84,39.32 -23.22,39.33 -52.41,39.53 -50.91,39.53 -44.91,39.53 -38.41,39.53 -30.91,39.53 -27.91,39.53 -24.91,39.53 -21.91,39.53 -20.41,39.53 -14.41,39.53 -12.91,39.53 -11.41,39.53 -9.91,39.53 -8.41,39.53 -120.08,39.79 -118.46,39.78 -118.03,39.79 -118.17,40.96 -124.59,40.97 -124.06,40.97 -123.57,40.97 -118.56,40.98 -123.1,41 -98.76,41.91 -56.92,42.39 -44.92,42.39 -30.92,42.39 -27.92,42.39 -24.92,42.39 -21.92,42.39 -20.42,42.39 -15.92,42.39 -14.42,42.39 -12.91,42.391 -11.42,42.39 -9.92,42.39 -8.42,42.39 -124.67,42.51 -124.17,42.51 -123.67,42.51 -123.17,42.51 -122.67,42.51 -67.425,42.65 -45.51,42.76 -44.72,42.76 -46.36,42.8 -40.76,42.8 -40.16,42.8 -39.51,42.83 -38.9,42.82 -98.74,43.65 -48.52,43.64 -100.19,43.98 -51.68,44.4 -114.85,44.53 -81.66,44.65 -79.06,44.68 -114.85,45.1 -51.71,45.45 -114.91,46.14 -51.77,46.49 -60.16,47.3 -101.42,47.66 -121.04,47.87 -120.54,47.87 -120.04,47.87 -119.54,47.87 -119.04,47.87 -104.82,48.23 -121.06,48.42 -120.56,48.42 -120.06,48.42 -119.56,48.42 -119.06,48.42 -95.29,48.8 -121.06,48.95 -120.56,48.95 -120.06,48.95 -119.56,48.95 -119.06,48.95 -60.16,49.07 -121.05,49.49 -120.55,49.49 -120.05,49.49 -119.55,49.49 -119.05,49.49 -121.05,50.08 -120.55,50.08 -120.05,50.08 -119.55,50.08 -119.05,50.08 -82.32,50.42 -90.39,50.5 -87.55,50.5 -93.15,50.54 -84.79,50.54 -121.06,50.68 -120.56,50.68 -120.06,50.68 -119.56,50.68 -119.06,50.68 -121.06,51.36 -120.56,51.36 -120.06,51.36 -119.56,51.36 -119.06,51.36 -103.08,51.43 -103.93,51.46 -104.67,51.48 -121.06,52 -120.56,52 -120.06,52 -119.56,52 -119.06,52 -115.02,52.4 -121.05,52.64 -120.55,52.64 -120.05,52.64 -119.55,52.64 -119.05,52.64 -104.45,52.79 -96.92,54.07 -77.26,54.1 -115,54.14 -76.32,54.2 -121.01,55.02 -120.51,55.02 -120.01,55.02 -119.51,55.02 -119.01,55.02 -111.65,55.27 -107.56,55.43 -121,55.49 -120.5,55.49 -120,55.49 -119.5,55.49 -119,55.49 -77.13,55.57 -76.49,55.59 -114.55,55.64 -107.55,55.91 -121.01,55.95 -120.51,55.95 -120.01,55.95 -119.51,55.95 -119.01,55.95 -107.58,56.42 -121.02,56.43 -120.52,56.43 -120.02,56.43 -119.52,56.43 -119.02,56.43 -114.46,56.44 -113.91,56.43 -115.02,56.46 -76.46,57.13 -77.2,57.14 -22.21,59.07 -15.07,59.48 -38.8,60.48 -28.81,60.62 -22.25,60.9 -67.16,61.13 -76.82,61.18 -15.07,61.55 -57.2,61.57 -40.36,62.04 -128.94,62.45 -131.44,62.52 -131.41,62.97 -128.93,62.97 -41.39,63.07 -124.62,63.21 -124.12,63.2 -123.57,63.19 -123.09,63.19 -122.6,63.2 -125.08,63.22 -131.41,63.41 -130.9,63.46 -129.42,63.45 -128.94,63.45 -130.15,63.47 -123.08,63.76 -122.62,63.76 -125.1,63.78 -124.58,63.78 -124.11,63.79 -123.6,63.79 -104,63.89 -101.21,64.21 -15.21,64.52 -22.39,64.58 -31.02,64.96 -121.83,66.71 -32.53,67.41 -94.49,70.03 -104.65,70.83 -104.18,70.82 -104.21,71.26 -104.68,71.28 -41.91,71.28 -36.63,71.37 -46.77,71.42 -104.68,71.76 -105.15,71.79 -126.77,73.99 -120.5,74.15 -114.77,74.29 -71.8,75.03 -69.95,75.03 -106.37,76.72 -111.03,76.76 -116.96,76.85 -122.96,77.07 -77.63,81.48 -89.75,82.3 -77.24,82.57 -73.3,82.64 -89.95,84.01 -89.94,84.57 -73.18,85.57 -77.23,85.76 -108.66,85.89 -73.14,86.04 -130.53,86.17 -105.6,86.3 -77.27,86.38 -73.14,86.46 -130.57,86.76 -130.57,87.37 -105.47,88.46 -105.04,88.66 -134.57,89.02 -133.19,89.03 -104.82,89.02 -124.71,89.08 -124.81,89.85 -124.34,89.86 -124.68,90.99 -125.68,91.01 -125.16,91.01 -123.7,94.76 -126.01,94.8 -128.19,94.83 -110.96,94.85 -113.45,94.87 -109.05,94.87
HPD: D2.2 J3.19 R11.2 | length 11.7
  F.Cu w0.25: R11.2@-53.44,16.118 -53.44,15.94 v1(-52.96,15.46) -52.49,15.93 D2.2@-52.49,16.153 ; v1(-50.335,8.4) -49.93,7.995 J3.19@-49.93,6.805
  B.Cu w0.2: v1(-52.96,15.46) -52.96,12.625 -52.685,12.35 -50.335,10 v1(-50.335,8.4)
HSI+: C42.1 U6.13 | length 3.8
  F.Cu w0.17: U6.13@-90.985,29.74 -90.685,29.74 -90.621,29.804 -89.204,29.804 -88.645,30.363 -87.945,30.363 -87.62,30.037 C42.1@-87.59,30.037
HSI-: C38.1 U6.14 | length 3.8
  F.Cu w0.17: U6.14@-90.985,30.14 -90.685,30.14 -90.621,30.076 -89.317,30.076 -88.758,30.635 -87.945,30.635 -87.62,30.96 C38.1@-87.59,30.96
HSIO_0_TX+: A1.13 C27.1 | length 61
  F.Cu w0.17: C27.1@-120.762,20.492 -120.762,20.522 -120.438,20.846 -120.438,21.534 -119.916,22.056 -119.045,22.056 v1(-118.93,22.171) ; v1(-79.52,22.171) -79.405,22.056 -73.709,22.056 -69.051,26.714 -69.051,31.921 -69.165,32.035 A1.13@-69.165,32.76
  B.Cu w0.17: v1(-118.93,22.171) -118.815,22.056 -79.635,22.056 v1(-79.52,22.171)
HSIO_0_TX-: A1.15 C26.1 | length 61
  F.Cu w0.17: C26.1@-119.842,20.492 -119.842,20.522 -120.166,20.846 -120.166,21.421 -119.804,21.784 -119.045,21.784 v1(-118.93,21.669) ; v1(-79.52,21.669) -79.405,21.784 -73.596,21.784 -68.779,26.601 -68.779,31.921 -68.665,32.035 A1.15@-68.665,32.76
  B.Cu w0.17: v1(-118.93,21.669) -118.815,21.784 -79.635,21.784 v1(-79.52,21.669)
HSIO_1_TX+: A1.19 C29.1 | length 59.4
  F.Cu w0.17: C29.1@-116.88,20.48 -116.85,20.48 -116.526,20.156 -115.545,20.156 v1(-115.43,20.271) ; v1(-80.5,20.751) -80.385,20.636 -72.879,20.636 -67.551,25.964 -67.551,31.921 -67.665,32.035 A1.19@-67.665,32.76
  B.Cu w0.17: v1(-115.43,20.271) -115.315,20.156 -113.506,20.156 -113.026,20.636 -112.594,20.636 -112.412,20.817 -111.994,20.817 -111.812,20.636 -111.394,20.636 -111.212,20.817 -110.794,20.817 -110.612,20.636 -110.194,20.636 -110.012,20.817 -109.594,20.817 -109.412,20.636 -106.759,20.636 -80.615,20.636 v1(-80.5,20.751)
HSIO_1_TX-: A1.21 C28.1 | length 59.4
  F.Cu w0.17: C28.1@-116.88,19.56 -116.85,19.56 -116.526,19.884 -115.545,19.884 v1(-115.43,19.769) ; v1(-80.5,20.249) -80.385,20.364 -72.766,20.364 -67.279,25.851 -67.279,31.921 -67.165,32.035 A1.21@-67.165,32.76
  B.Cu w0.17: v1(-115.43,19.769) -115.315,19.884 -113.394,19.884 -112.914,20.364 -80.615,20.364 v1(-80.5,20.249)
HSIO_2_RX+: A1.28 J15.43 | length 63.4
  F.Cu w0.17: J15.43@-116.47,38.53 -115.845,38.53 -115.731,38.416 -112.425,38.416 v1(-112.31,38.531) ; v1(-98.75,42.529) -98.635,42.644 -77.111,42.644 -73.551,46.204 -66.846,46.204 -65.301,44.659 -65.301,41.799 -65.415,41.685 A1.28@-65.415,40.96
  B.Cu w0.17: v1(-112.31,38.531) -112.425,38.416 -113.174,38.416 -113.664,38.906 -113.664,39.474 -113.224,39.914 -112.629,39.914 -112.396,39.681 -111.929,39.681 -111.696,39.914 -111.229,39.914 -110.996,39.681 -110.529,39.681 -110.296,39.914 -109.829,39.914 -109.596,39.681 -109.129,39.681 -108.896,39.914 -108.429,39.914 -108.196,39.681 -107.729,39.681 -107.496,39.914 -107.029,39.914 -106.796,39.681 -106.329,39.681 -106.096,39.914 -105.629,39.914 -105.396,39.681 -104.929,39.681 -104.696,39.914 -104.229,39.914 -103.996,39.681 -103.529,39.681 -103.296,39.914 -102.544,39.914 -102.412,40.046 -99.814,42.644 -98.865,42.644 v1(-98.75,42.529)
HSIO_2_RX-: A1.30 J15.41 | length 63.4
  F.Cu w0.17: J15.41@-116.47,38.03 -115.845,38.03 -115.731,38.144 -112.425,38.144 v1(-112.31,38.029) ; v1(-98.75,43.031) -98.635,42.916 -77.224,42.916 -73.664,46.476 -66.734,46.476 -65.029,44.771 -65.029,41.799 -64.915,41.685 A1.30@-64.915,40.96
  B.Cu w0.17: v1(-112.31,38.029) -112.425,38.144 -113.286,38.144 -113.936,38.794 -113.936,39.586 -113.336,40.186 -102.656,40.186 -99.926,42.916 -98.865,42.916 v1(-98.75,43.031)
HSIO_2_TX+: A1.25 C49.1 | length 52.8
  F.Cu w0.17: C49.1@-105.34,44.45 -105.31,44.45 -104.976,44.116 -100.855,44.116 v1(-100.74,44.231) ; v1(-66.166,37.35) -66.051,37.235 -66.051,33.599 -66.165,33.485 A1.25@-66.165,32.76
  B.Cu w0.17: v1(-100.74,44.231) -100.855,44.116 -101.454,44.116 -101.724,44.386 -101.724,45.064 -101.084,45.704 -100.124,45.704 -99.891,45.471 -99.424,45.471 -99.191,45.704 -98.724,45.704 -98.491,45.471 -98.024,45.471 -97.791,45.704 -97.324,45.704 -97.091,45.471 -96.624,45.471 -96.391,45.704 -95.924,45.704 -95.691,45.471 -95.224,45.471 -94.991,45.704 -94.524,45.704 -94.291,45.471 -93.824,45.471 -93.591,45.704 -93.124,45.704 -92.891,45.471 -92.424,45.471 -92.191,45.704 -91.724,45.704 -91.491,45.471 -91.024,45.471 -90.791,45.704 -86.218,45.704 -77.686,45.704 -72.916,40.934 -68.486,40.934 -66.051,38.499 -66.051,37.465 v1(-66.166,37.35)
HSIO_2_TX-: A1.27 C50.1 | length 52.8
  F.Cu w0.17: C50.1@-105.34,43.51 -105.31,43.51 -104.976,43.844 -100.855,43.844 v1(-100.74,43.729) ; A1.27@-65.665,32.76 -65.665,33.485 -65.779,33.599 -65.779,37.235 v1(-65.664,37.35)
  B.Cu w0.17: v1(-100.74,43.729) -100.855,43.844 -101.566,43.844 -101.996,44.274 -101.996,45.176 -101.196,45.976 -77.574,45.976 -72.804,41.206 -68.374,41.206 -65.779,38.611 -65.779,37.465 v1(-65.664,37.35)
HSIO_3_RX+: A1.34 J16.41 | length 68.3
  F.Cu w0.17: J16.41@-116.77,62.51 -116.145,62.51 -116.031,62.624 -114.116,62.624 -113.953,62.461 -113.953,62.204 -113.586,61.838 -113.33,61.838 -112.963,61.471 -112.963,61.214 -112.597,60.848 -112.34,60.848 -111.973,60.481 -111.973,60.224 -111.607,59.858 -111.35,59.858 -110.896,59.404 -110.52,59.404 -108.014,59.404 -107.354,60.064 -97.996,60.064 -94.156,56.224 -76.955,56.224 v1(-76.84,56.109) ; A1.34@-63.915,40.96 -63.915,41.685 -63.801,41.799 -63.801,42.425 v1(-63.916,42.54)
  B.Cu w0.17: v1(-76.84,56.109) -76.725,56.224 -74.019,56.224 -68.706,50.911 -68.706,44.134 -67.766,43.194 -64.066,43.194 -63.801,42.929 -63.801,42.655 v1(-63.916,42.54)
HSIO_3_RX-: A1.36 J16.43 | length 68.3
  F.Cu w0.17: J16.43@-116.77,63.01 -116.145,63.01 -116.031,62.896 -114.004,62.896 -110.784,59.676 -108.126,59.676 -107.466,60.336 -97.884,60.336 -94.044,56.496 -76.955,56.496 v1(-76.84,56.611) ; A1.36@-63.415,40.96 -63.415,41.685 -63.529,41.799 -63.529,42.425 v1(-63.414,42.54)
  B.Cu w0.17: v1(-76.84,56.611) -76.725,56.496 -73.906,56.496 -68.434,51.024 -68.434,44.246 -67.654,43.466 -63.954,43.466 -63.529,43.041 -63.529,42.655 v1(-63.414,42.54)
HSIO_3_TX+: A1.31 C55.1 | length 60.8
  F.Cu w0.17: C55.1@-105.34,58.22 -105.31,58.22 -104.981,58.549 -104.749,58.549 -104.568,58.368 -104.149,58.368 -103.968,58.549 -103.549,58.549 -103.368,58.368 -102.949,58.368 -102.768,58.549 -102.349,58.549 -102.168,58.368 -101.749,58.368 -101.568,58.549 -100.715,58.549 -99.321,58.549 -95.416,54.644 -76.945,54.644 v1(-76.83,54.529) ; v1(-64.666,39.16) -64.551,39.045 -64.551,33.599 -64.665,33.485 A1.31@-64.665,32.76
  B.Cu w0.17: v1(-76.83,54.529) -76.715,54.644 -74.516,54.644 -70.416,50.544 -70.416,43.924 -68.346,41.854 -65.816,41.854 -64.551,40.589 -64.551,39.275 v1(-64.666,39.16)
HSIO_3_TX-: A1.33 C56.1 | length 60.8
  F.Cu w0.17: C56.1@-105.34,59.15 -105.31,59.15 -104.981,58.821 -99.209,58.821 -95.304,54.916 -76.945,54.916 v1(-76.83,55.031) ; A1.33@-64.165,32.76 -64.165,33.485 -64.279,33.599 -64.279,39.045 v1(-64.164,39.16)
  B.Cu w0.17: v1(-76.83,55.031) -76.715,54.916 -74.404,54.916 -70.144,50.656 -70.144,44.036 -68.234,42.126 -65.704,42.126 -64.279,40.701 -64.279,39.275 v1(-64.164,39.16)
HSIO_8_RX+: A1.40 J2.A16 | length 77.2
  F.Cu w0.17: v1(-62.416,36.39) -62.301,36.505 -62.301,40.121 -62.415,40.235 A1.40@-62.415,40.96
  B.Cu w0.17: J2.A16@-131.5,36.05 -132.4,36.05 -132.52,35.93 -132.52,35.55 -132.292,35.322 -73.24,35.322 -72.806,35.756 -62.536,35.756 -62.301,35.991 -62.301,36.275 v1(-62.416,36.39)
HSIO_8_RX-: A1.42 J2.A17 | length 77.2
  F.Cu w0.17: A1.42@-61.915,40.96 -61.915,40.235 -62.029,40.121 -62.029,36.505 v1(-61.914,36.39)
  B.Cu w0.17: J2.A17@-133.5,35.05 -129.12,35.05 -128.983,34.913 -128.42,34.913 -128.283,35.05 -127.256,35.05 -73.128,35.05 -72.694,35.484 -62.424,35.484 -62.029,35.879 -62.029,36.275 v1(-61.914,36.39)
HSIO_8_TX+: A1.37 C1.1 | length 74.8
  F.Cu w0.17: C1.1@-125.31,37.51 -125.28,37.51 -124.951,37.181 -121.09,37.181 -120.664,36.755 -120.664,30.156 -120.408,29.9 -119.615,29.9 v1(-119.5,30.015)
  F.Cu w0.201: v1(-63.19,29.28) -63.09,29.38 -63.09,31.96 -63.165,32.035 A1.37@-63.165,32.76
  B.Cu w0.17: v1(-119.5,30.015) -119.385,29.9 -119.001,29.9 -118.797,30.105 -118.301,30.105 -118.097,29.9 -117.601,29.9 -117.397,30.105 -116.901,30.105 -116.697,29.9 -116.201,29.9 -115.997,30.105 -115.501,30.105 -115.297,29.9 -113.471,29.9 -103.295,29.9 -101.695,28.3 -63.56,28.3 -63.09,28.77 -63.09,29.18 v1(-63.19,29.28)
HSIO_8_TX-: A1.39 C2.1 | length 74.8
  F.Cu w0.17: C2.1@-125.31,36.58 -125.28,36.58 -124.951,36.909 -121.203,36.909 -120.936,36.642 -120.936,30.044 -120.406,29.513 v1(-119.5,29.513)
  F.Cu w0.201: A1.39@-62.665,32.76 -62.665,32.035 -62.74,31.96 -62.74,29.38 v1(-62.64,29.28)
  B.Cu w0.17: v1(-119.5,29.513) -119.385,29.628 -103.408,29.628 -101.808,28.028 -63.447,28.028 -63.388,28.088 -63.345,28.088 -62.788,28.644 -62.788,29.132 v1(-62.64,29.28)
HSIO_9_RX+: A1.46 J2.A21 | length 80.5
  F.Cu w0.17: v1(-60.916,36.39) -60.801,36.505 -60.801,40.121 -60.915,40.235 A1.46@-60.915,40.96
  B.Cu w0.17: J2.A21@-133.5,31.05 -130.162,31.05 -127.132,34.08 -61.632,34.08 -60.801,34.911 -60.801,36.275 v1(-60.916,36.39)
HSIO_9_RX-: A1.48 J2.A22 | length 81
  F.Cu w0.17: A1.48@-60.415,40.96 -60.415,40.235 -60.529,40.121 -60.529,36.505 v1(-60.414,36.39)
  B.Cu w0.17: J2.A22@-131.5,30.05 -132.09,30.05 -132.24,30.2 -132.24,30.62 -132.082,30.778 -130.05,30.778 -127.02,33.808 -61.52,33.808 -60.529,34.799 -60.529,36.275 v1(-60.414,36.39)
HSIO_9_TX+: A1.43 C3.1 | length 74.4
  F.Cu w0.17: C3.1@-125.31,33.5 -125.28,33.5 -124.951,33.171 -122.445,33.171 -122.013,32.739 -122.013,29.505 -121.008,28.5 -120.715,28.5 v1(-120.6,28.615)
  F.Cu w0.201: v1(-61.666,29.28) -61.566,29.38 -61.566,31.936 A1.43@-61.665,32.035 ; A1.43@-61.665,32.76 A1.43@-61.665,32.035 ; A1.43@-61.59,31.96 A1.43@-61.665,32.035
  B.Cu w0.17: v1(-120.6,28.615) -120.485,28.5 -119.779,28.5 -119.598,28.681 -119.079,28.681 -118.898,28.5 -118.379,28.5 -118.198,28.681 -117.679,28.681 -117.498,28.5 -116.979,28.5 -116.798,28.681 -116.279,28.681 -116.098,28.5 -114.497,28.5 -103.535,28.5 -101.965,26.93 -62.522,26.93 -61.551,27.901 -61.551,29.165 v1(-61.666,29.28)
HSIO_9_TX-: A1.45 C4.1 | length 74.4
  F.Cu w0.17: C4.1@-125.31,32.57 -125.28,32.57 -124.951,32.899 -122.558,32.899 -122.285,32.626 -122.285,29.393 -121.12,28.228 -120.715,28.228 v1(-120.6,28.113)
  F.Cu w0.201: A1.45@-61.24,31.96 A1.45@-61.165,32.035 ; v1(-61.164,29.28) -61.264,29.38 -61.264,31.936 A1.45@-61.165,32.035 ; A1.45@-61.165,32.76 A1.45@-61.165,32.035
  B.Cu w0.17: v1(-120.6,28.113) -120.485,28.228 -103.648,28.228 -102.078,26.658 -62.41,26.658 -61.279,27.789 -61.279,29.165 v1(-61.164,29.28)
HSIO_10_RX+: A1.52 J2.A25 | length 84.8
  F.Cu w0.17: v1(-59.416,36.39) -59.301,36.505 -59.301,40.121 -59.415,40.235 A1.52@-59.415,40.96
  B.Cu w0.17: J2.A25@-133.5,27.05 -130.205,27.05 -129.929,27.326 -129.929,27.647 -129.594,27.981 -129.273,27.981 -128.939,28.316 -128.939,28.637 -128.604,28.971 -128.283,28.971 -127.949,29.306 -127.949,29.627 -127.614,29.961 -127.294,29.961 -126.959,30.296 -126.959,30.617 -126.624,30.951 -126.304,30.951 -125.969,31.286 -125.969,31.606 -125.634,31.941 -125.314,31.941 -124.776,32.478 -124.553,32.702 -61.09,32.702 -59.301,34.491 -59.301,36.275 v1(-59.416,36.39)
HSIO_10_RX-: A1.54 J2.A26 | length 84.8
  F.Cu w0.17: A1.54@-58.915,40.96 -58.915,40.235 -59.029,40.121 -59.029,36.505 v1(-58.914,36.39)
  B.Cu w0.17: J2.A26@-131.5,26.05 -132.33,26.05 -132.5,26.22 -132.5,26.54 -132.27,26.77 -130.1,26.77 -124.44,32.43 -60.978,32.43 -59.029,34.379 -59.029,36.275 v1(-58.914,36.39)
HSIO_10_TX+: A1.49 C5.1 | length 75.7
  F.Cu w0.17: C5.1@-125.32,29.517 -125.29,29.517 -124.963,29.189 -123.873,29.189 -123.364,28.681 -123.364,26.056 -122.794,25.486 -122.515,25.486 v1(-122.4,25.601)
  F.Cu w0.201: v1(-60.166,29.28) -60.066,29.38 -60.066,31.936 A1.49@-60.165,32.035 ; A1.49@-60.165,32.76 A1.49@-60.165,32.035 ; A1.49@-60.09,31.96 A1.49@-60.165,32.035
  B.Cu w0.17: v1(-122.4,25.601) -122.285,25.486 -121.715,25.486 -121.534,25.668 -121.015,25.668 -120.834,25.486 -120.315,25.486 -120.134,25.668 -119.615,25.668 -119.434,25.486 -118.915,25.486 -118.734,25.668 -118.215,25.668 -118.034,25.486 -117.11,25.486 -61.386,25.486 -60.051,26.821 -60.051,29.165 v1(-60.166,29.28)
HSIO_10_TX-: A1.51 C6.1 | length 75.7
  F.Cu w0.17: C6.1@-125.32,28.59 -125.29,28.59 -124.963,28.917 -123.985,28.917 -123.636,28.568 -123.636,25.944 -122.907,25.214 -122.515,25.214 v1(-122.4,25.099)
  F.Cu w0.201: A1.51@-59.74,31.96 A1.51@-59.665,32.035 ; v1(-59.664,29.28) -59.764,29.38 -59.764,31.936 A1.51@-59.665,32.035 ; A1.51@-59.665,32.76 A1.51@-59.665,32.035
  B.Cu w0.17: v1(-122.4,25.099) -122.285,25.214 -61.273,25.214 -59.779,26.709 -59.779,29.165 v1(-59.664,29.28)
HSIO_11_RX+: A1.58 J2.A29 | length 87.8
  F.Cu w0.17: v1(-57.916,36.39) -57.801,36.505 -57.801,40.121 -57.915,40.235 A1.58@-57.915,40.96
  B.Cu w0.17: J2.A29@-133.5,23.05 -130.382,23.05 -121.926,31.506 -59.566,31.506 -57.801,33.271 -57.801,36.275 v1(-57.916,36.39)
HSIO_11_RX-: A1.60 J2.A30 | length 87.8
  F.Cu w0.17: A1.60@-57.415,40.96 -57.415,40.235 -57.529,40.121 -57.529,36.505 v1(-57.414,36.39)
  B.Cu w0.17: J2.A30@-131.5,22.05 -130.772,22.778 -130.27,22.778 -129.383,23.665 -129.079,23.665 -128.736,24.007 -128.736,24.312 -128.393,24.655 -128.089,24.655 -127.746,24.997 -127.746,25.302 -127.403,25.645 -127.099,25.645 -126.756,25.987 -126.756,26.292 -126.413,26.635 -126.109,26.635 -125.766,26.977 -125.766,27.282 -125.423,27.624 -125.119,27.624 -124.776,27.967 -124.776,28.272 -124.433,28.614 -124.129,28.614 -123.786,28.957 -123.786,29.262 -123.443,29.604 -123.139,29.604 -122.796,29.947 -122.796,30.251 -122.293,30.754 -121.814,31.234 -59.454,31.234 -57.529,33.159 -57.529,36.275 v1(-57.414,36.39)
HSIO_11_TX+: A1.55 C7.1 | length 76.3
  F.Cu w0.17: C7.1@-125.32,25.52 -125.29,25.52 -124.961,25.191 -124.499,25.191 -123.08,23.772 -121.542,23.772 v1(-121.427,23.887)
  F.Cu w0.201: v1(-58.666,29.28) -58.566,29.38 -58.566,31.936 A1.55@-58.665,32.035 ; A1.55@-58.665,32.76 A1.55@-58.665,32.035 ; A1.55@-58.59,31.96 A1.55@-58.665,32.035
  B.Cu w0.17: v1(-121.427,23.887) -121.312,23.772 -121.113,23.772 -120.931,23.953 -120.413,23.953 -120.231,23.772 -119.713,23.772 -119.531,23.953 -119.013,23.953 -118.831,23.772 -118.313,23.772 -118.131,23.953 -117.613,23.953 -117.431,23.772 -116.502,23.772 -60.21,23.772 -58.551,25.431 -58.551,29.165 v1(-58.666,29.28)